# Altium PCB Universal-Power-Board.PcbDoc
Units mm, origin at the board's own origin, x right, y up, seen from the top; angles counter-clockwise.
Board outline 133 x 120 mm, 2 copper layers (Top Layer, Bottom Layer), stack 1.2 mm thick; 33 components, 12 nets, 90 pads, 68 vias.
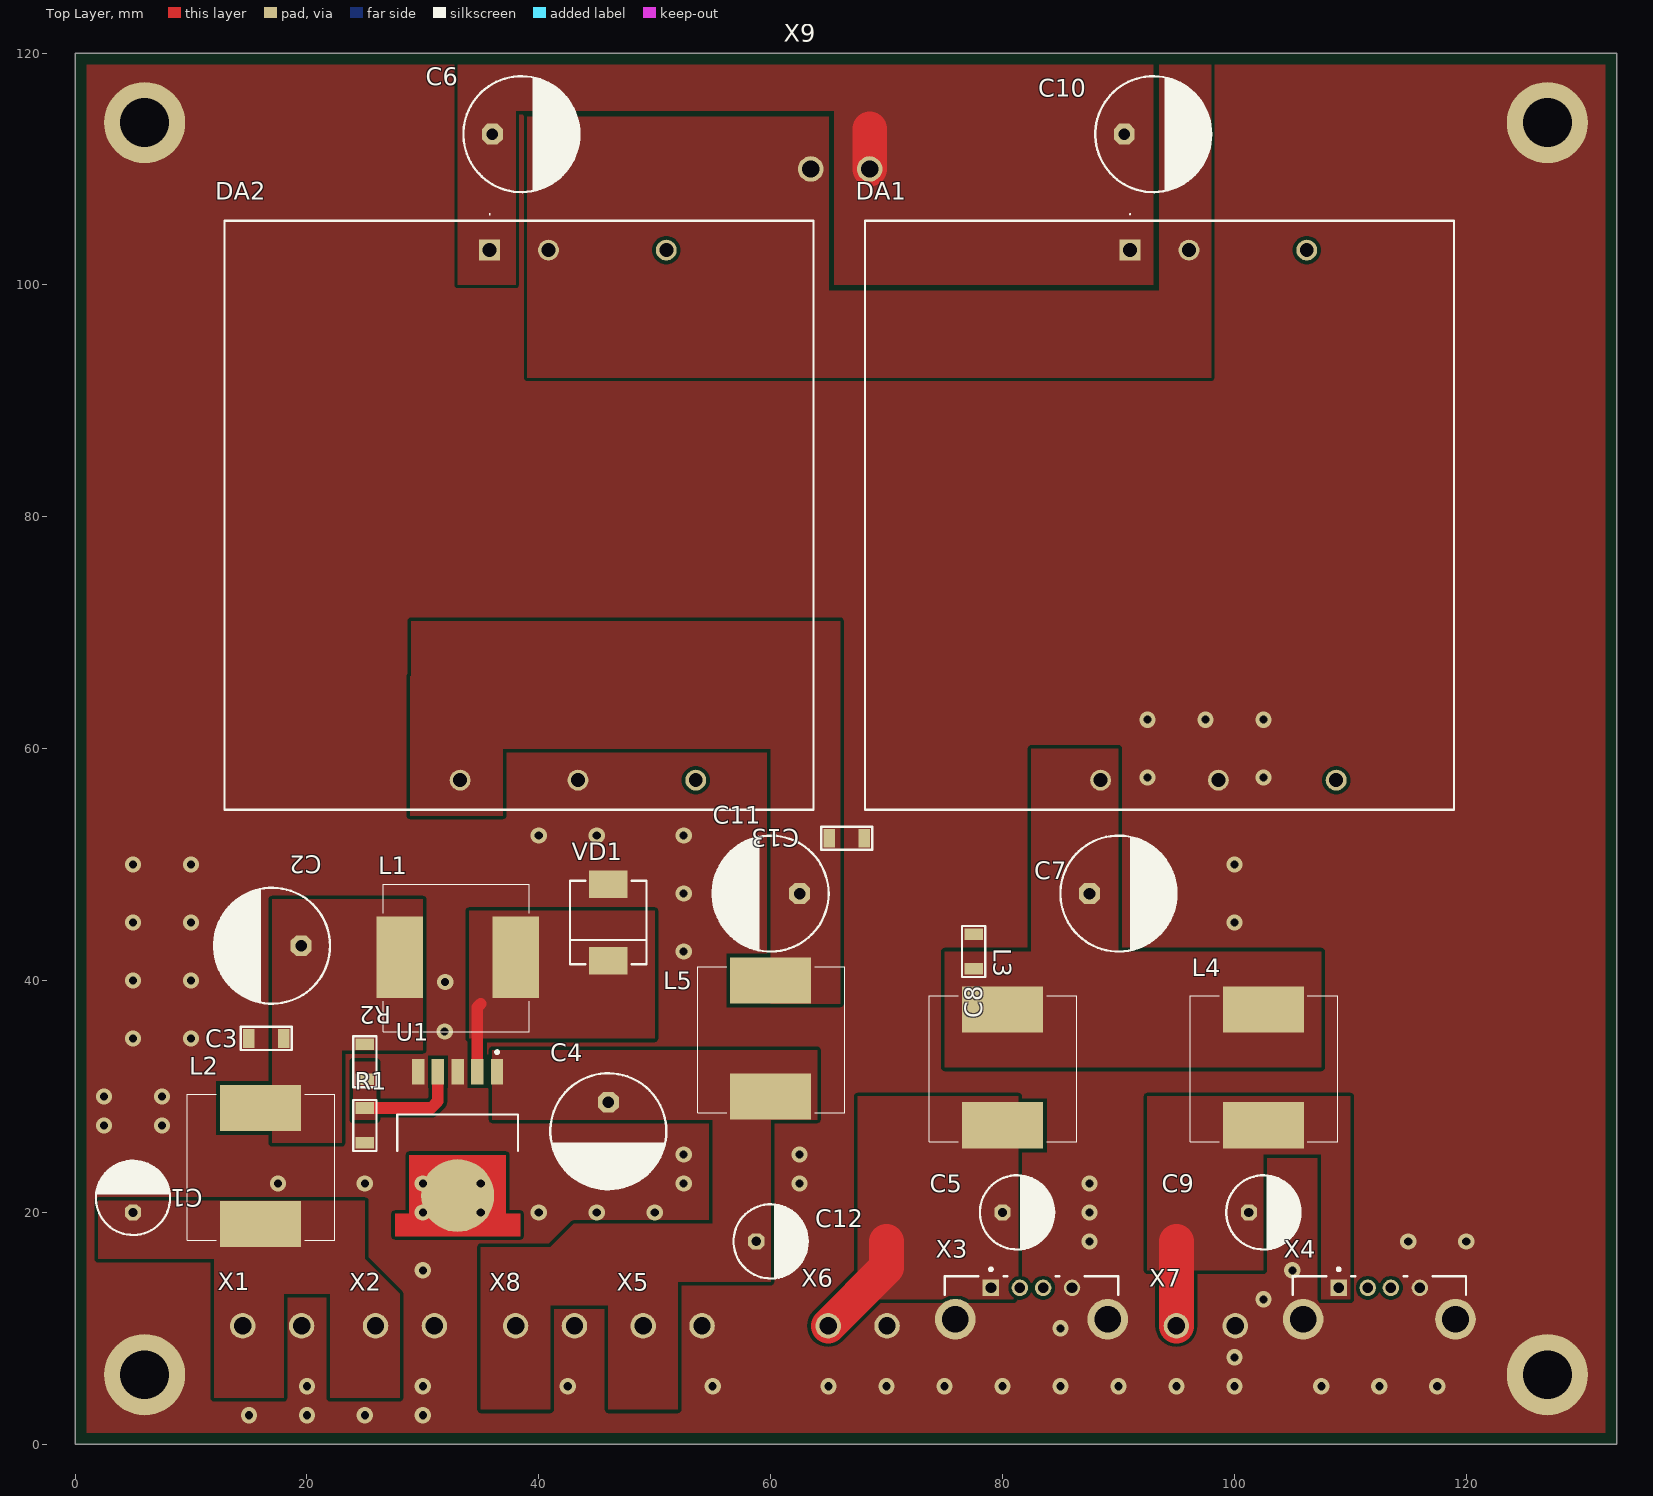
[diagram p0: Top Layer view]
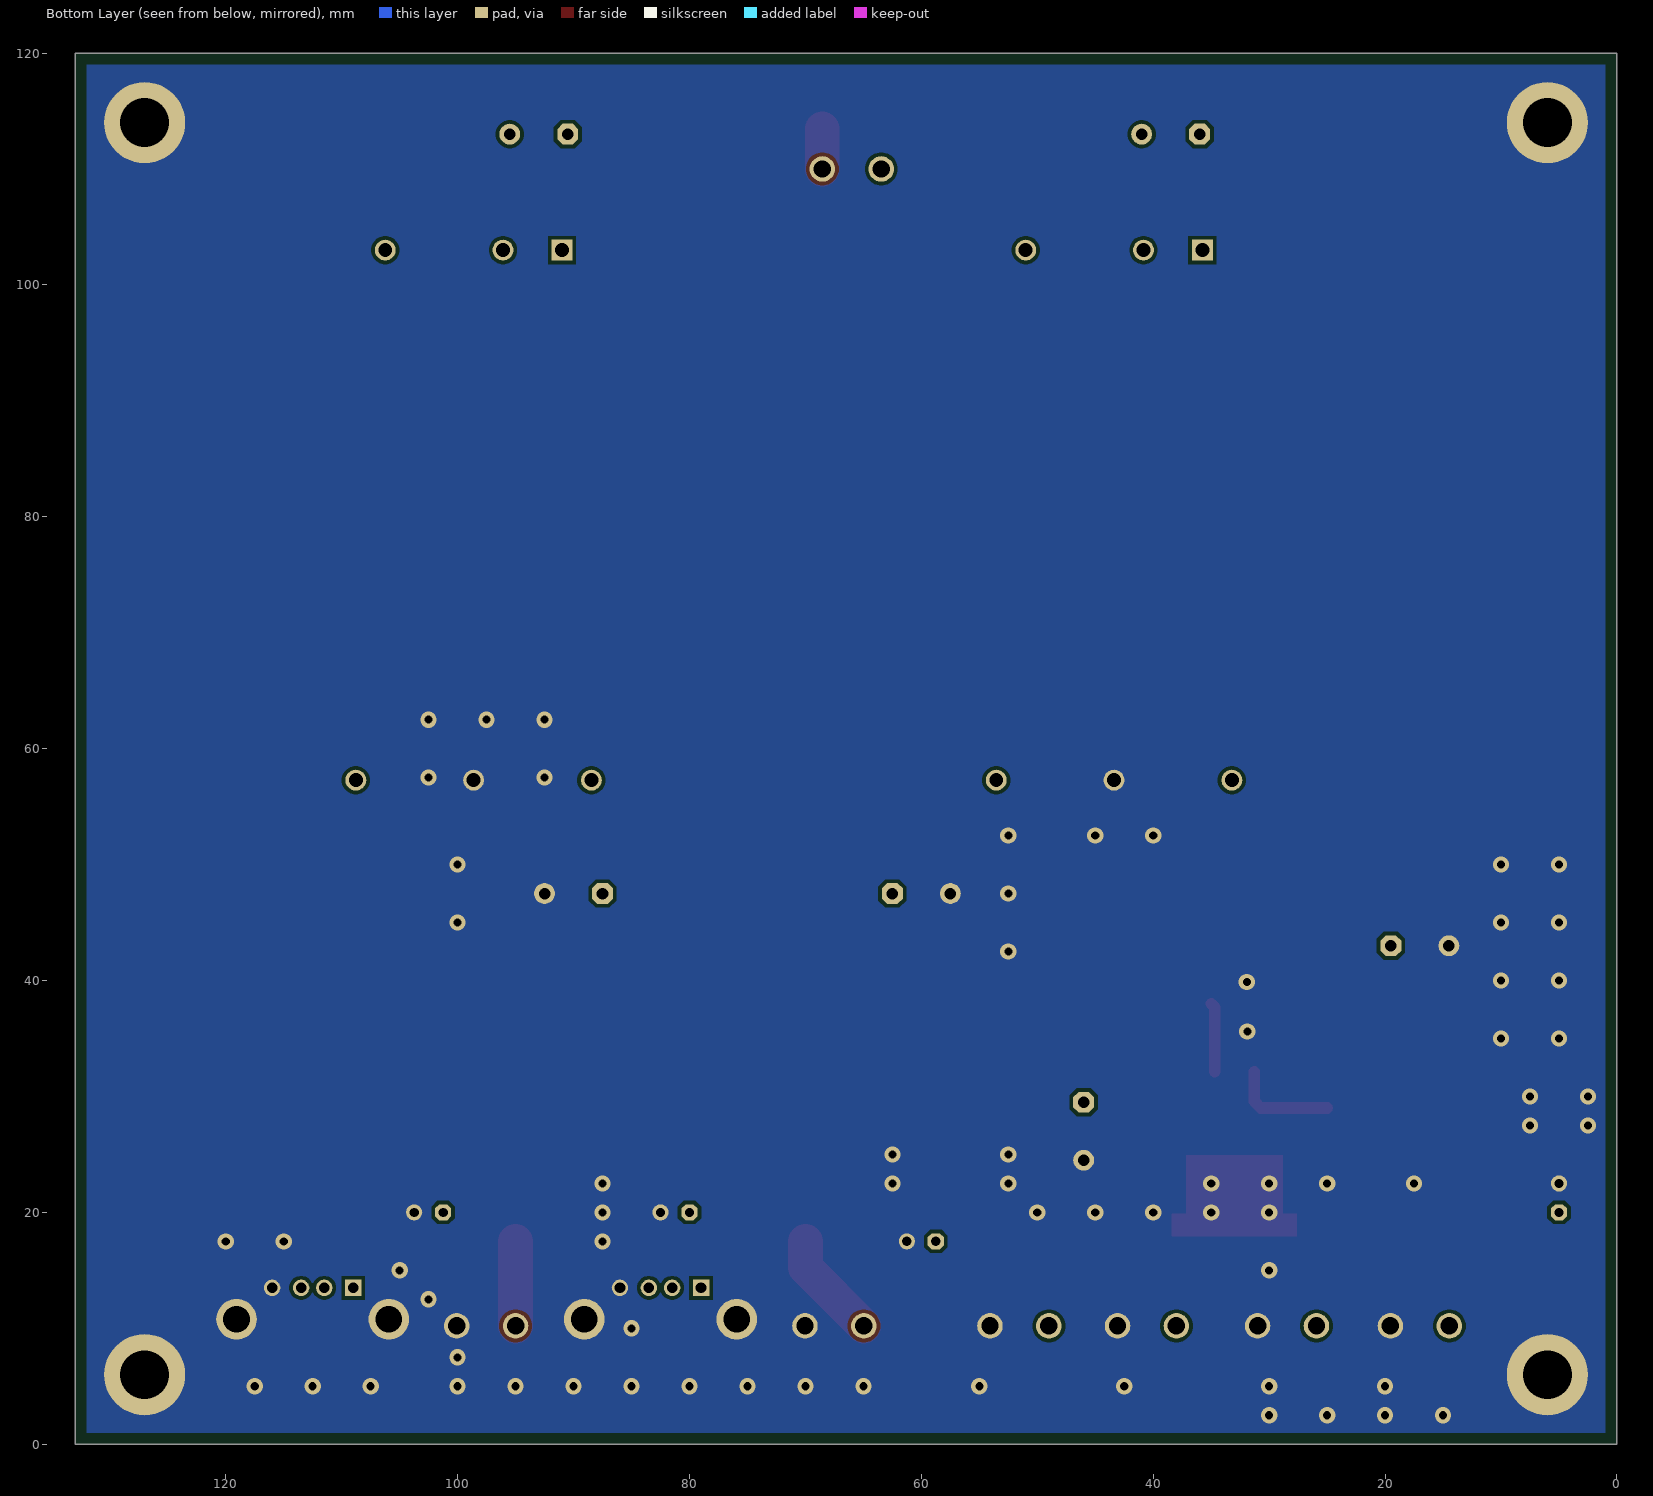
[diagram p1: Bottom Layer view, seen from below]
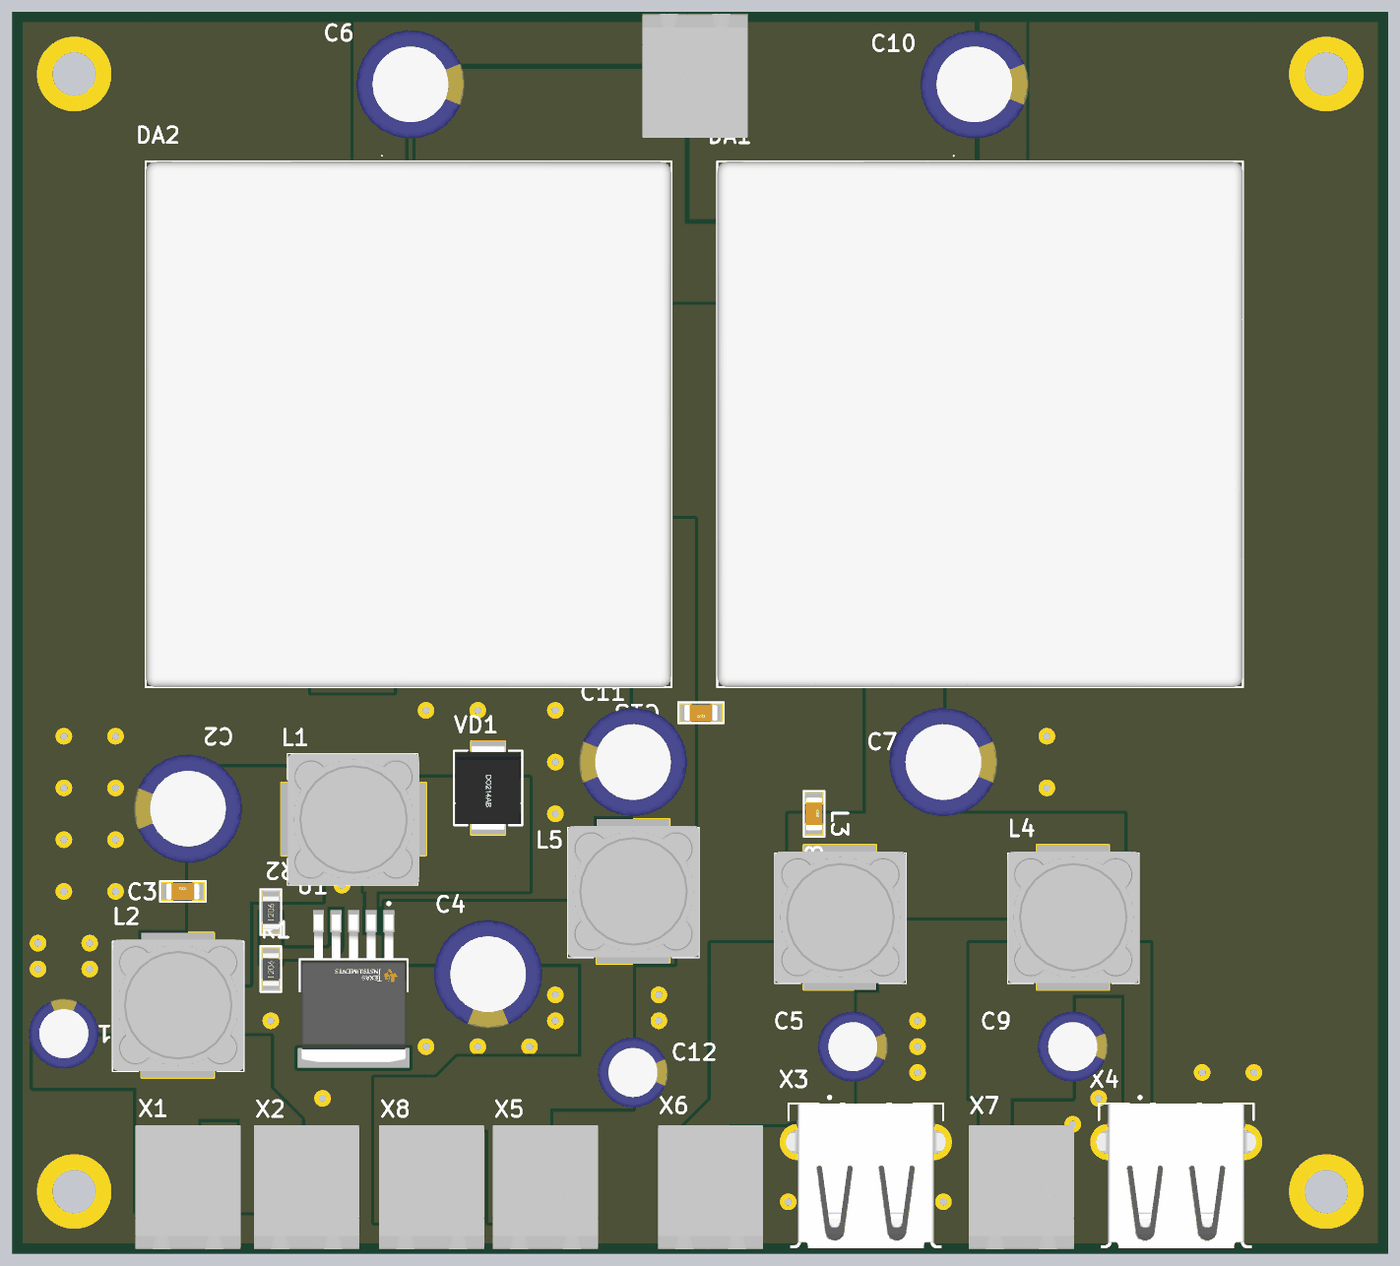
[diagram p2: 3D render of the assembled board from above, using the file's embedded part models]

## Layer stack, top to bottom
Top Solder: solder mask 0.02, Solder Resist, Dk 3.5
Top Layer: signal copper 0.018
Dielectric 1: dielectric 1.164, FR-4, Dk 4.8
Bottom Layer: signal copper 0.018
Bottom Solder: solder mask 0.02, Solder Resist, Dk 3.5

## Board outline
0,0 133,0 133,120 0,120

## Design rules (kind name [scope] priority, off if disabled: settings)
Clearance [All] p1: gap=0.3 ignorepadtopadclearanceinfootprint=FALSE
DiffPairsRouting [All] p1: maxlimit=0.254 minlimit=0.1 mostfreqgap=0.2 toplayer_minwidth=0.1 toplayer_maxwidth=0.4 toplayer_prefwidth=0.2 bottomlayer_minwidth=0.1 bottomlayer_maxwidth=0.4 bottomlayer_prefwidth=0.2 maxuncoupledlength=12.7
PolygonConnect [All] p1: connectstyle=Direct reliefconductorwidth=0.254 reliefentries=4 polygonreliefangle="90 Angle" airgapwidth=0.254
RoutingVias [All] p1: holewidth=0.711 width=1.27 viastyle="Through Hole" minholewidth=0.711 minwidth=1.27 maxholewidth=0.711 maxwidth=1.27
SolderMaskExpansion [All] p1: expansion=0.102 istentingtop=FALSE
Width [All] p1: maxlimit=5 minlimit=0.1 preferedwidth=0.3
29 further rules are at their usual default settings.

## Classes and differential pairs
component class Universal-Power-Board: C1 C2 C3 C4 C7 C8 C13 DA1 DA2 L1 L2 L3 L5 R1 R2 U1 VD1 X1 X2 X3 X4 X5 X6 X9

## Components (designator, comment, footprint, x,y, rotation, side; value= is the part's Value field where it differs from the comment)
C1 "Aluminium capacitor, 10μF, 25V, ±20%, 54mOhm, 14x10x5 mm, -55...+105°C" "CAP: D6.3C2.5H11" 5,21.25 r90 top value=10μF
C2 "Aluminium capacitor, 220μF, 63V, ±20%, 54mOhm, 14x10x5 mm, -55...+105°C" "CAP: D10C5H16" 17,43 r180 top value=220μF
C3 "Ceramic capacitor, 0.1μF, X7R, ±10%, 50V, 1206, -55...+125°C" "CAP: 1206" 16.5,35 r0 top value=0.1μF
C4 "Aluminium capacitor, 680μF, 25V, ±20%, 54mOhm, 14x10x5 mm, -55...+105°C" "CAP: D10C5H16" 46,27 r270 top value=680μF
C5 "Aluminium capacitor, 10μF, 25V, ±20%, 54mOhm, 14x10x5 mm, -55...+105°C" "CAP: D6.3C2.5H11" 81.25,20 r0 top value=10μF
C6 "Aluminium capacitor, 220μF, 63V, ±20%, 54mOhm, 14x10x5 mm, -55...+105°C" "CAP: D10C5H16" 38.5,113 r0 top value=220μF
C7 "Aluminium capacitor, 220μF, 63V, ±20%, 54mOhm, 14x10x5 mm, -55...+105°C" "CAP: D10C5H16" 90,47.5 r0 top value=220μF
C8 "Ceramic capacitor, 0.1μF, X7R, ±10%, 50V, 1206, -55...+125°C" "CAP: 1206" 77.5,42.5 r270 top value=0.1μF
C9 "Aluminium capacitor, 10μF, 25V, ±20%, 54mOhm, 14x10x5 mm, -55...+105°C" "CAP: D6.3C2.5H11" 102.5,20 r0 top value=10μF
C10 "Aluminium capacitor, 220μF, 63V, ±20%, 54mOhm, 14x10x5 mm, -55...+105°C" "CAP: D10C5H16" 93,113 r0 top value=220μF
C11 "Aluminium capacitor, 220μF, 63V, ±20%, 54mOhm, 14x10x5 mm, -55...+105°C" "CAP: D10C5H16" 60,47.5 r180 top value=220μF
C12 "Aluminium capacitor, 10μF, 25V, ±20%, 54mOhm, 14x10x5 mm, -55...+105°C" "CAP: D6.3C2.5H11" 60,17.5 r0 top value=10μF
C13 "Ceramic capacitor, 0.1μF, X7R, ±10%, 50V, 1206, -55...+125°C" "CAP: 1206" 66.571,52.272 r180 top value=0.1μF
DA1 "SDM30-24S5" SDM3024S5 91,103 r180 top
DA2 "SDM30-24S12" SDM3024S12 35.76,103 r180 top
L1 "Fixed inductor, 33μH, ±20%, SDR0403, 1.7A, -40...+125°C" SRR1208-101YL 33,42 r0 top value=33μH
L2 "Fixed inductor, 33μH, ±20%, SDR0403, 1.7A, -40...+125°C" SRR1208-101YL 16,24 r90 top value=33μH
L3 "Fixed inductor, 33μH, ±20%, SDR0403, 1.7A, -40...+125°C" SRR1208-101YL 80,32.5 r90 top value=33μH
L4 "Fixed inductor, 33μH, ±20%, SDR0403, 1.7A, -40...+125°C" SRR1208-101YL 102.5,32.5 r90 top value=33μH
L5 "Fixed inductor, 33μH, ±20%, SDR0403, 1.7A, -40...+125°C" SRR1208-101YL 60,35 r90 top value=33μH
R1 "Resistor film, 100R, ±5%, 1206, 0.25W, -55...+125°C" "RES: 1206" 25,27.5 r90 top value=100R
R2 "Resistor film, 100R, ±5%, 1206, 0.25W, -55...+125°C" "RES: 1206" 25,33 r90 top value=100R
U1 "LM2596SX-12/NOPB" FP-KTT0005B-MFG 33,24 r180 top
VD1 "Schottky diode, 80V, 500mA, 1V, 15pF, SOD-123, -55...+150°C" "DIODE: SMC" 46,45 r270 top
X1 "Connector, 6pin, 2.54mm, 500VAC, 3A" 2EDGR-5.08-02P 17,10.21 r0 top
X2 "Connector, 6pin, 2.54mm, 500VAC, 3A" 2EDGR-5.08-02P 28.46,10.21 r0 top
X3 "USB micro B" FP-292303-4-MFG 82.5,7.5 r0 top
X4 "USB micro B" FP-292303-4-MFG 112.5,7.5 r0 top
X5 "Connector, 6pin, 2.54mm, 500VAC, 3A" 2EDGR-5.08-02P 51.54,10.21 r0 top
X6 "Connector, 6pin, 2.54mm, 500VAC, 3A" 2EDGR-5.08-02P 67.5,10.21 r0 top
X7 "Connector, 6pin, 2.54mm, 500VAC, 3A" 2EDGR-5.08-02P 97.54,10.21 r0 top
X8 "Connector, 6pin, 2.54mm, 500VAC, 3A" 2EDGR-5.08-02P 40.54,10.21 r0 top
X9 "Connector, 6pin, 2.54mm, 500VAC, 3A" 2EDGR-5.08-02P 66,110 r180 top

## Footprints (in the part's own frame and the unit in brackets; to place one, negate y for a bottom-side part, rotate by r counter-clockwise, add the part's x,y. Pads: shape width x height; smd on the part's side, far side on the other; paste and mask are expansions set on the pad)
2EDGR-5.08-02P [mm]
  round 2.2 hole 1.5: 1(-2.54,0) 2(2.54,0)
  body extent -5.08,-9.81 5.08,2.19, height 9.05
"CAP: 1206" [mm]
  rect 1x1.6 smd: 1(-1.5,0) 2(1.5,0)
  silkscreen extent -2.2,-1 2.2,1, body extent -1.6,-0.8 1.6,0.8, height 1
"CAP: D6.3C2.5H11" [mm]
  oct 1.4x1.4 hole 0.8: 1(-1.25,0)
  round 1.4 hole 0.8: 2(1.25,0)
  silkscreen extent -3.2,-3.2 3.2,3.2, body extent -3.4,-3.4 3.4,3.4, height 12.5
"CAP: D10C5H16" [mm]
  oct 1.8x1.8 hole 1: 1(-2.5,0)
  round 1.8 hole 1: 2(2.5,0)
  silkscreen extent -5,-5 5,5, body extent -5.25,-5.25 5.25,5.25, height 17.55
"DIODE: SMC" [mm]
  rect 2.4x3.3 smd: 1(-3.3,0) 2(3.3,0)
  silkscreen extent -3.6,-3.3 3.6,3.3, body extent -4.06,-3.15 4.06,3.15, height 2.67
FP-292303-4-MFG [mm]
  rect 1.42x1.42 hole 0.92 paste-1000 mask+0: 1(-3.5,5.99)
  round 1.42 hole 0.92 paste-1000 mask+0: 2(-1,5.99) 3(1,5.99) 4(3.5,5.99)
  round 3.5 hole 2.3 paste-1000 mask+0: 5(-6.57,3.28) 6(6.57,3.28)
  silkscreen extent -7.47,5.4 7.47,7.71, body extent -8.42,-7.1 8.42,7.1, height 0.25
FP-KTT0005B-MFG [mm]
  rect 1.07x2.16 smd paste+0 mask+0: 1(-3.4,-8.13) 2(-1.7,-8.13) 3(0,-8.13) 4(1.7,-8.13) 5(3.4,-8.13)
  round 6.291 smd paste+0 mask+0: 6(0,2.545)
  Top Layer region: -5.4,6.04 5.4,6.04 5.4,4.13 4.165,4.13 4.165,-0.95 -4.165,-0.95 -4.165,4.13 -5.4,4.13 -5.4,6.04
  silkscreen extent -5.21,-9.95 5.21,-1.33, body extent -5.5,-9.31 5.5,6.14, height 0.25
"RES: 1206" [mm]
  rect 1x1.6 smd: 1(-1.5,0) 2(1.5,0)
  silkscreen extent -2.2,-1 2.2,1, body extent -1.65,-0.8 1.55,0.8, height 0.47
SDM3024S5 [mm]
  rect 1.8x1.8 hole 1.2: 1(0,0)
  round 1.8 hole 1.2: 2(-5.08,0) 4(-15.24,0) 6(2.54,45.72) 7(-7.62,45.72) 8(-17.78,45.72)
  silkscreen extent -27.94,-3.15 22.86,48.26, body extent -27.94,-2.54 22.86,48.26, height 16
SDM3024S12 [mm]
  rect 1.8x1.8 hole 1.2: 1(0,0)
  round 1.8 hole 1.2: 2(-5.08,0) 4(-15.24,0) 6(2.54,45.72) 7(-7.62,45.72) 8(-17.78,45.72)
  silkscreen extent -27.94,-3.15 22.86,48.26, body extent -27.94,-2.54 22.86,48.26, height 16
SRR1208-101YL [mm]
  rect 4x7 smd: 1(-5,0) 2(5,0)
  silkscreen extent -6.4,-6.4 6.2,6.3, body extent -6.35,-6.4 6.35,6.3, height 8.5

## Part data
C1 C4 C5 C9 C12: library part Aluminium, Manufacturer=Wurth, Package="14x10x5 mm", PartNumber=860080475013, Temperature=-55...+105°C, Tolerance=±20%, TypeCapacitor="Aluminium capacitor", Voltage=25V, HelpURL=https://www.digikey.com/product-detail/en/wurth-electronics-inc/860080475013/732-9029-1-ND/5728972, Impedance=54mOhm
  C1 C5 C9 C12: ValueManufacturerPartNumber="Aluminium capacitor, 10μF, 25V, ±20%, 54mOhm, 14x10x5 mm, -55...+105°C"
  C4: ValueManufacturerPartNumber="Aluminium capacitor, 680μF, 25V, ±20%, 54mOhm, 14x10x5 mm, -55...+105°C"
C2 C6 C7 C10 C11: library part Aluminium, Manufacturer=Wurth, Package="14x10x5 mm", PartNumber=860080475013, Temperature=-55...+105°C, Tolerance=±20%, TypeCapacitor="Aluminium capacitor", Voltage=63V, HelpURL=https://www.digikey.com/product-detail/en/wurth-electronics-inc/860080475013/732-9029-1-ND/5728972, Impedance=54mOhm, ValueManufacturerPartNumber="Aluminium capacitor, 220μF, 63V, ±20%, 54mOhm, 14x10x5 mm, -55...+105°C"
C3 C8 C13: library part Ceramic_1206, Manufacturer=Yageo, Package=1206, PartNumber=CC1206KRX7R9BB104, Temperature=-55...+125°C, Tolerance=±10%, TypeCapacitor="Ceramic capacitor", TypeDielectric=X7R, Voltage=50V, HelpURL=https://www.digikey.com/product-detail/en/yageo/CC1206KRX7R9BB104/311-1179-1-ND/303089, ValueManufacturerPartNumber="Ceramic capacitor, 0.1μF, X7R, ±10%, 50V, 1206, -55...+125°C"
DA1 DA2: "Power Supply", Manufacturer_Name="Mean Well", Datasheet Link=https://meanwell.hu/userfiles/webshop/products/attachments/SDM30-24S5.pdf, Height=16mm
  DA1: Manufacturer_Part_Number=SDM30-24S5
  DA2: Manufacturer_Part_Number=SDM30-24S12
L1 L2 L3 L4 L5: library part Inductor_SDR0403, Manufacturer=Bourns, MaxCurrent=1.7A, Package=SDR0403, PartNumber=SDR0403-4R7ML, Temperature=-40...+125°C, Tolerance=±20%, TypeInductor="Fixed inductor", HelpURL=https://www.digikey.com/product-detail/en/bourns-inc/SDR0403-4R7ML/SDR0403-4R7MLCT-ND/2127096, ValueManufacturerPartNumber="Fixed inductor, 33μH, ±20%, SDR0403, 1.7A, -40...+125°C"
R1 R2: library part Resistor_1206, Manufacturer=Yageo, Package=1206, PartNumber=RC1206JR-07100RL, Power=0.25W, Temperature=-55...+125°C, Tolerance=±5%, TypeResistor="Resistor film", HelpURL=https://www.digikey.com/product-detail/en/yageo/RC1206JR-07100RL/311-100ERCT-ND/732153, ValueManufacturerPartNumber="Resistor film, 100R, ±5%, 1206, 0.25W, -55...+125°C"
U1: library part CMP-04918-000013-1, "IC REG BUCK 12V 3A TO263-5", Manufacturer="Texas Instruments", Max Junction Temp=+150°C, Max Supply Voltage=40V, Min Supply Voltage=4.5V, Nominal Supply Current=5mA, Output Current=3A, Output Voltage=12V, Package=KTT0005B, Switching Frequency=150kHz, Temperature="-40°C to +125°C", Temperature Range High=+125°C, Temperature Range Low=-40°C, Automotive=No, Category=IC, ComponentLink2Description=Datasheet, ComponentLink2URL=http://www.ti.com/lit/ds/symlink/lm2596.pdf, Device Class L1="Integrated Circuits (ICs)", Device Class L2="Power Management ICs", Device Class L3="Voltage Regulators - Switching", Digikey Description="IC REG BUCK 12V 3A TO263-5", Height=4.8mm, Lead Free=Yes, Manufacturer Part Number=LM2596SX-12/NOPB, Max Duty Cycle=100%, Mouser Description="SIMPLE SWITCHER® 4.5V to 40V, 3A Low Component Count Step-Down Regulator 5-DDPAK/TO-263", Number of Outputs=1, Octopart=https://octopart.com/lm2596sx-12%2Fnopb-texas+instruments-24812942, Output Type=Fixed, RoHS=TRUE, Standoff Height=0mm, Switching Topology=Buck
VD1: library part Schottky_single, Current=500mA, Manufacturer="Diodes Incorporated", Package=SOD-123, PartNumber=SK34, Temperature=-55...+150°C, Voltage=80V, VoltageDrop=1V, HelpURL=https://www.digikey.com/product-detail/en/diodes-incorporated/MBR0580S1-7/MBR0580S1-7DICT-ND/5080371, RecoveryTime=15pF, TypeDiode="Schottky diode", ValueManufacturerPartNumber="Schottky diode, 80V, 500mA, 1V, 15pF, SOD-123, -55...+150°C"
X1 X2 X5 X6 X7 X8 X9: library part 2EDGR-5.08-02P, CurrentMax=3A, Manufacturer=Connfly, PartNumber=PBS-6, VoltageMax=500VAC, CommentText="\"Разъем\"", HelpURL=https://www.chipdip.ru/product/pbs-6, Multichannel=6pin, Pitch=2.54mm, TypeConnector=Connector, ValueManufacturerPartNumber="Connector, 6pin, 2.54mm, 500VAC, 3A"
X3 X4: library part Connector_USB_micro_B, Manufacturer="Hirose Electric", PartNumber=ZX62-B-5PA, CommentText="\"USB\"", HelpURL=https://www.digikey.com/product-detail/en/hirose-electric-co-ltd/ZX62-B-5PA/H11579CT-ND/1851090, TypeConnector="USB micro B", ValueManufacturerPartNumber="USB micro B"

## Free pads (board coordinates)
  round 7 hole 4.2: 2(6,6) 2(6,114) 2(127,6) 2(127,114)

## Via types
v1: diameter 1.4, hole 0.7, Top Layer to Bottom Layer, 68 vias

## Nets (pads, with @x,y where several pads share a name; then routed paths per layer and width w, separated by ;. In a path a pad name is that pad's centre, name@x,y a point inside that pad or via, vN(x,y) a via of type N, cw(c..) or ccw(c..) an arc to the next point about the centre after c; other vN are vias at no path point)
+5: C9.1 L4.1 X4.1 X7.1 | length 7.3
  Top Layer w3: X7.1 95,17.5
+5V: C5.1 L3.1 X3.1 X6.1 | length 9.4
  Top Layer w3: X6.1 70,15.25 70,17.5
+6V: C1.1 L2.1 X1.1 X2.1
+12: C4.1 C12.1 L5.1 U1.1 X5.1 X8.1
"+28 V": C6.1 C10.1 DA1.1 DA2.1 X9.1 | length 3.5
  Top Layer w3: X9.1 68.54,113.46
GND: C1.2 C2.2 C3.1 C4.2 C5.2 C7.2 C8.1 C9.2 C11.2 C12.2 C13.1 DA1.7 DA2.7 pad.2 R1.1 U1.3 U1.5 U1.6 VD1.1 X1.2 X2.2 X3.4 X3.5 X3.6 X4.4 X4.5 X4.6 X5.2 X6.2 X7.2 X8.2
  other v1: 15,2.5 20,2.5 25,2.5 30,2.5 20,5 30,5 42.5,5 55,5 65,5 70,5 75,5 80,5 85,5 90,5 95,5 100,5 107.5,5 112.5,5 117.5,5 100,7.5 85,10 102.5,12.5 30,15 105,15 87.5,17.5 115,17.5 120,17.5 30,20 35,20 40,20 45,20 50,20 87.5,20 17.5,22.5 25,22.5 30,22.5 35,22.5 52.5,22.5 62.5,22.5 87.5,22.5 52.5,25 62.5,25 2.5,27.5 7.5,27.5 2.5,30 7.5,30 5,35 10,35 31.885,35.605 31.926,39.863 5,40 10,40 52.5,42.5 5,45 10,45 100,45 52.5,47.5 5,50 10,50 100,50 40,52.5 45,52.5 52.5,52.5 92.5,57.5 102.5,57.5 92.5,62.5 97.5,62.5 102.5,62.5
NetC2_1: C2.1 C3.2 L1.1 L2.2 R2.2
NetC6_2: C6.2 C10.2 DA1.2 DA2.2 X9.2
NetC7_1: C7.1 C8.2 DA1.6 L3.2 L4.2
NetC11_1: C11.1 C13.2 DA2.6 L5.2
NetL1_2: L1.2 U1.2 VD1.2 | length 6
  Top Layer w1: U1.2 34.7,37.7 35,38
NetR1_2: R1.2 R2.1 U1.4 | length 9.1
  Top Layer w1: R1.2 30.714,29 31.3,29.586 U1.4
pads on no net: DA1.4 DA1.8 DA2.4 DA2.8 X3.2 X3.3 X4.2 X4.3

## Polygon pours and split planes (outlines as drawn)
GND on Top Layer "NONET_L02_P-001" (solid, pour order 37): 1,1 1,119 132,119 132,1
NetC7_1 on Top Layer "NONET_L02_P-001" (solid, pour order 31): 82.5,60 90,60 90,32.5 82.5,32.5
NetC7_1 on Top Layer "NONET_L02_P-001" (solid, pour order 32): 107.5,42.5 75,42.5 75,32.5 107.5,32.5
+5 on Top Layer "NONET_L02_P-001" (solid, pour order 33): 102.5,30 102.5,15 92.5,15 92.5,30
+5 on Top Layer "NONET_L02_P-001" (solid, pour order 34): 110,12.5 110,30 107.5,30 107.5,12.5
+5 on Top Layer "NONET_L02_P-001" (solid, pour order 35): 110,25 92.5,25 92.5,30 110,30
+5V on Top Layer "NONET_L02_P-001" (solid, pour order 36): 81.357,12.5 67.5,12.5 67.5,30 80,30 75,30 81.357,30
+12 on Top Layer "NONET_L02_P-001" (solid, pour order 22): 64,28 64,34 36,34 36,28
NetC11_1 on Top Layer "NETC11_1_L01_P006" (solid, pour order 6): 60,70 60,38 66,38 66,70
NetC6_2 on Top Layer "NONET_L02_P-001" (solid, pour order 28): 94,92 94,99.5 65,99.5 65,92
"+28 V" on Top Layer "NONET_L02_P-001" (solid, pour order 27): 66,119 66,115 33,115 33,119
NetC6_2 on Top Layer "NONET_L02_P-001" (solid, pour order 26): 39,114.5 65,114.5 65,92 39,92
"+28 V" on Top Layer "NONET_L02_P-001" (solid, pour order 25): 33,119 38,119 38,100 33,100
NetC6_2 on Top Layer "NONET_L02_P-001" (solid, pour order 24): 98,92 98,119 93.5,119 93.5,92
"+28 V" on Top Layer "NONET_L02_P-001" (solid, pour order 23): 93,100 93,119 65.5,119 65.5,100
NetR1_2 on Top Layer "NONET_L02_P-001" (solid, pour order 21): 26,28 26,33 24,33 24,28
NetL1_2 on Top Layer "NONET_L02_P-001" (solid, pour order 20): 34,46 50,46 50,35 34,35
NetC2_1 on Top Layer "NONET_L02_P-001" (solid, pour order 19): 30,34 30,47 17,47 17,34
NetC2_1 on Top Layer "NONET_L02_P-001" (solid, pour order 18): 17,47 23,47 23,26 17,26
+6V on Top Layer "NONET_L02_P-001" (solid, pour order 17): 2,21 25,21 25,17 24,16 2,16
NetC11_1 on Top Layer "NETC11_1_L01_P007" (solid, pour order 7): 66,60 29.131,60 29,60 29,60.318 29,71 66,71
NetC11_1 on Top Layer "NETC11_1_L01_P005" (solid, pour order 5): 28.907,66.224 36.907,66.224 36.906,54.224 28.907,54.224
+12 on Top Layer "+12_L01_P004" (solid, pour order 4): 41,12 35,12 35,3 41,3
+12 on Top Layer "+12_L01_P003" (solid, pour order 3): 52,12 46,12 46,3 52,3
+12 on Top Layer "+12_L01_P002" (solid, pour order 2): 35,12 35,17 41,17 43,19 55,19 55,32 60,32 60,14 52,14 52,12
+6V on Top Layer "+6V_L01_P001" (solid, pour order 1): 18,21 25,21 25,16 28,13 28,4 22,4 22,13 18,13
+6V on Top Layer "+6V_L01_P000" (solid, pour order 0): 18,21 12,21 12,4 18,4
GND on Bottom Layer "NONET_L02_P-001" (solid, pour order 38): 1,1 1,119 132,119 132,1